# EAGLE board SMARTBALL_v1.2 (EAGLE 9.0.0)
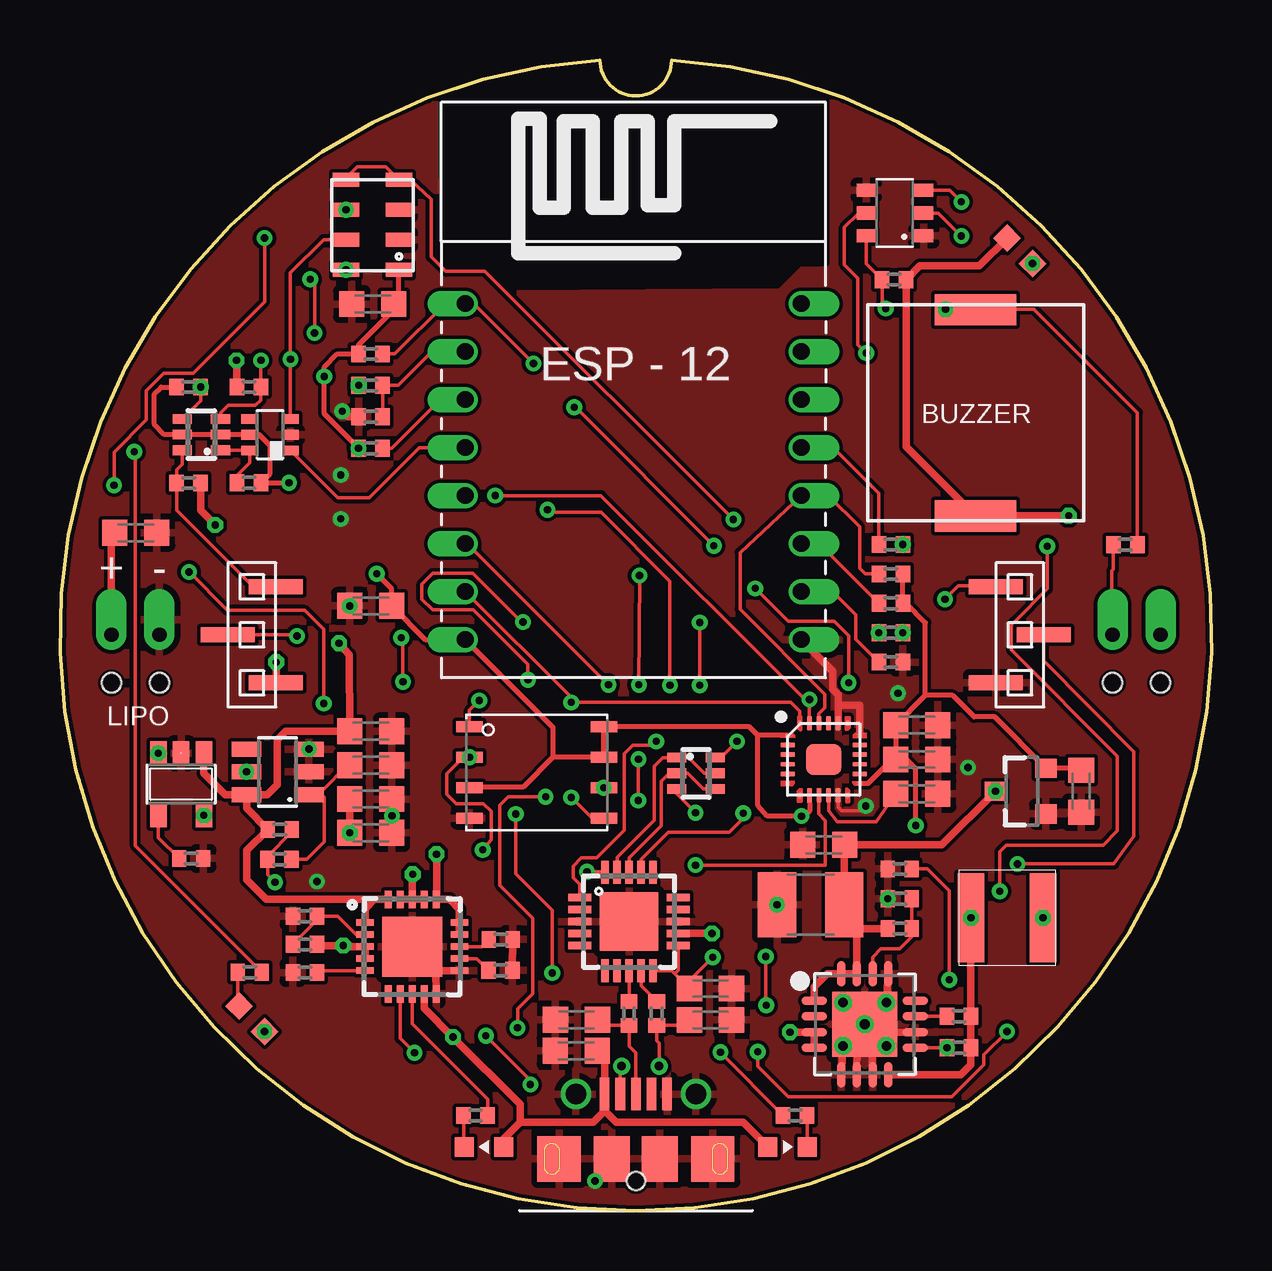
[diagram p0: board, top side]
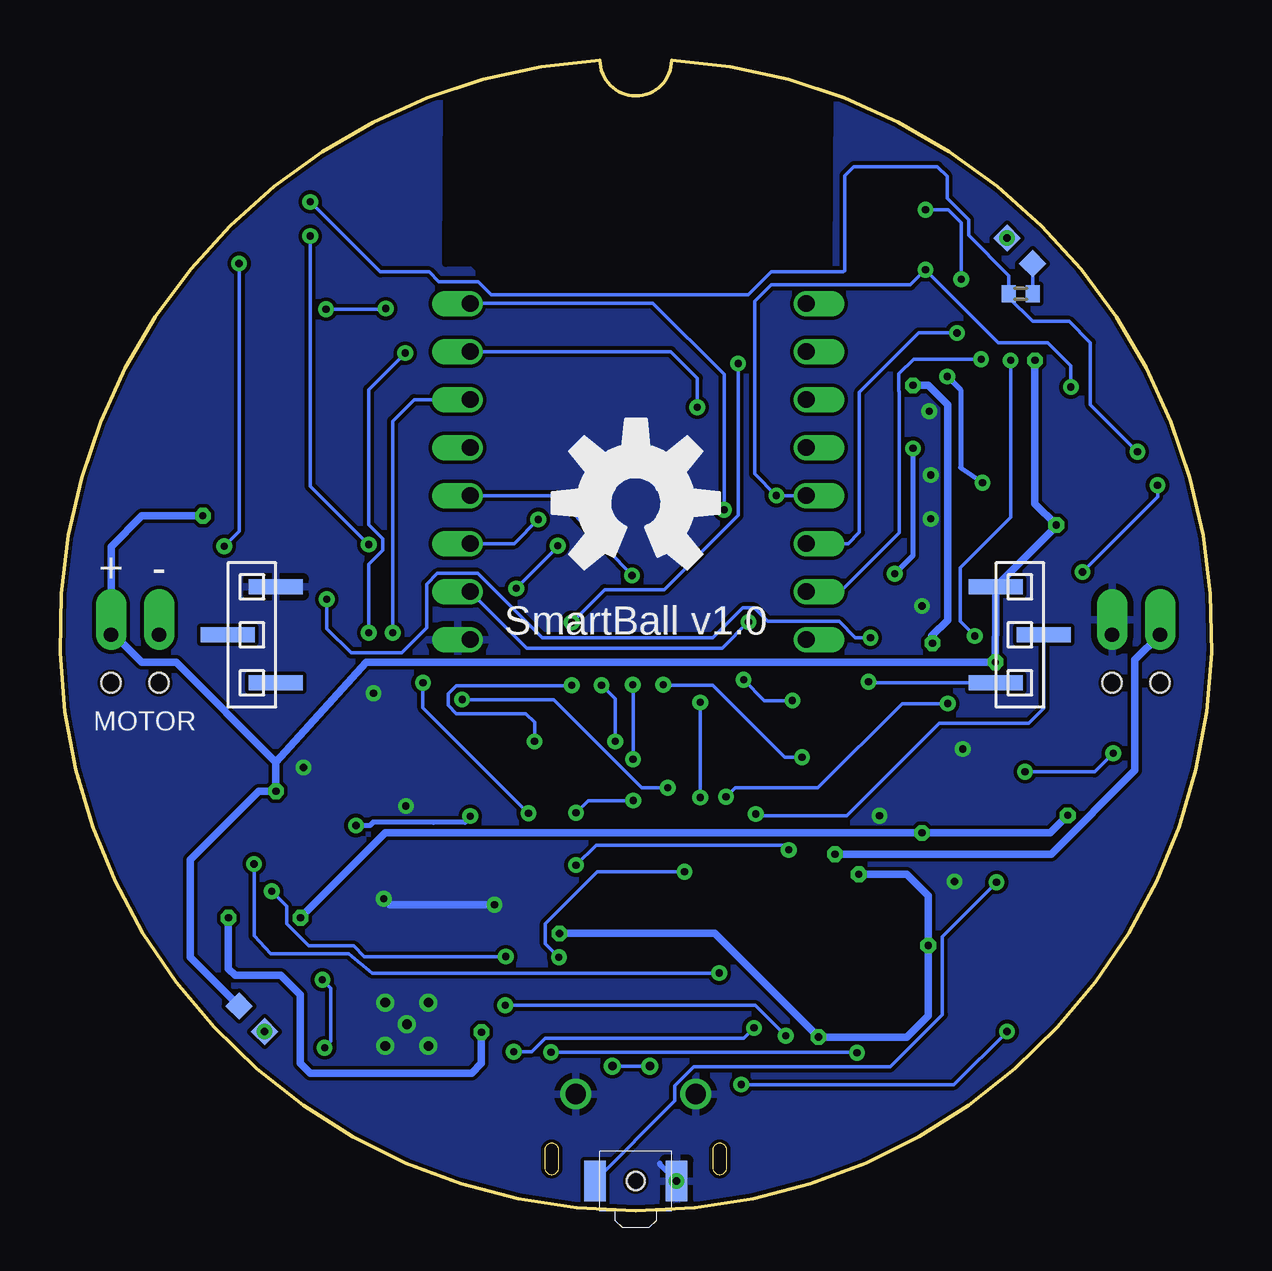
[diagram p1: board, bottom side, seen from below]

Size 47.98 x 47.96 mm. Coordinates in mm from the lower left corner, seen from the top.
Outline: 22.5,47.96 arc353 25.49,47.96 arc-180 22.5,47.96
Copper layers (1*16): Top 0.035mm / dielectric 1.5mm / Bottom 0.035mm
Design rules "PCBWay-LIMIT": minimum track width 4mil, minimum drill 0.3mm, track to track 6mil, track to pad 6mil, pad to pad 6mil, via to via 6mil, smd to smd 6mil, copper to edge 6mil, drill to drill 6mil, minimum pad ring 7mil, minimum via ring 7mil, stop-mask expansion 4mil, vias tented up to drill 25mil, thermal gap 10mil
Net classes: 0 default: width 0.152 mm; 1 power: width 0.254 mm; 2 +3v3: width 0.203 mm

## Footprints (pad centres in the part's own frame; a part is rotated, then mirrored left to right if it is on the bottom)
SOT457R_PHILIPS = smd 0.55 x 0.8: 1 -0.95,-1.2; 2 0,-1.2; 3 0.95,-1.2; 4 0.95,1.2; 5 0,1.2; 6 -0.95,1.2
BUZZER_PKMCS0909E4000-R1 = smd 1.3 x 3.4: P$1 -4.3,0; P$2 4.3,0
C0603K = smd 1.05 x 1.08: 1 -0.875,0; 2 0.875,0
C1210 = smd 1.6 x 2.7: 1 -1.4,0; 2 1.4,0
KINGBRIGHT_16X08 = smd 0.8 x 0.8: ANODE 0,0; CATHODE 1.65,0
ESP12 = drill 0.7 offset: ADC -7.1,3.8; CH_PD -7.1,1.8; GND 6.9,-8.2; GPIO0 6.9,-2.2; GPIO2 6.9,-4.2; GPIO4 6.9,1.8; GPIO5 6.9,-0.2; GPIO12 -7.1,-4.2; GPIO13 -7.1,-6.2; GPIO14 -7.1,-2.2; GPIO15 6.9,-6.2; GPIO16 -7.1,-0.2; RESET -7.1,5.8; RX 6.9,3.8; TX 6.9,5.8; VCC -7.1,-8.2
QFN20 = smd 0.95 x 0.3: 1 -2.05,1; 2 -2.05,0.5; 3 -2.05,0; 4 -2.05,-0.5; 5 -2.05,-1; 11 2.05,-1; 12 2.05,-0.5; 13 2.05,0; 14 2.05,0.5; 15 2.05,1 | smd 0.3 x 0.95: 6 -1,-2.05; 7 -0.5,-2.05; 8 0,-2.05; 9 0.5,-2.05; 10 1,-2.05; 16 1,2.05; 17 0.5,2.05; 18 0,2.05; 19 -0.5,2.05; 20 -1,2.05 | smd 2.45 x 2.45: EXP 0,0
SFH4050 = smd 0.8 x 0.8: P$1 -0.75,0; P$2 0.75,0
ASPIAIG-S4035 = smd 1.1 x 3.7: P$1 -1.5,0; P$2 1.5,0
MOTOR_CONNECTOR = drill 0.6 pad 1.27 offset: + 0,0; - 2,0 | hole 0.8: 0,-2; 2,-2
QFN20_4MM = smd 0.73 x 0.28: P$1 -1.965,1; P$2 -1.965,0.5; P$3 -1.965,0; P$4 -1.965,-0.5; P$5 -1.965,-1; P$11 1.965,-1; P$12 1.965,-0.5; P$13 1.965,0; P$14 1.965,0.5; P$15 1.965,1 | smd 0.28 x 0.73: P$6 -1,-1.965; P$7 -0.5,-1.965; P$8 0,-1.965; P$9 0.5,-1.965; P$10 1,-1.965; P$16 1,1.965; P$17 0.5,1.965; P$18 0,1.965; P$19 -0.5,1.965; P$20 -1,1.965 | smd 2.5 x 2.5: P$21 0,0
B3U-3000P-B = smd 0.9 x 1.7: P$1 0,0; P$2 3.4,0 | hole 0.75: 1.7,0
R0402 = smd 0.6 x 0.7: 1 -0.5,0; 2 0.5,0
PVQFN-16 = smd 1.05 x 0.35: 1 -2.1,0.975; 2 -2.1,0.325; 3 -2.1,-0.325; 4 -2.1,-0.975; 9 2.1,-0.975; 10 2.1,-0.325; 11 2.1,0.325; 12 2.1,0.975 | smd 0.35 x 1.05: 5 -0.975,-2.1; 6 -0.325,-2.1; 7 0.325,-2.1; 8 0.975,-2.1; 13 0.975,2.1; 14 0.325,2.1; 15 -0.325,2.1; 16 -0.975,2.1 | drill 0.4: P$18 0,0; P$19 -0.9,0.9; P$20 0.9,0.9; P$21 0.9,-0.9; P$22 -0.9,-0.9 | smd 2.7 x 2.7: THERMAL 0,0
MOLEX-USB = smd 0.4 x 1.35: D+ 0,2.7; D- -0.65,2.7; GND 1.3,2.7; ID 0.65,2.7; VUSB -1.3,2.7 | smd 1.8 x 1.9: P$1 -3.2,0; P$11 3.2,0 | drill 0.85: SHELL1 -2.5,2.7; SHELL2 2.5,2.7 | smd 1.5 x 1.9: SHELL5 -1,0; SHELL6 1,0
SOT23-5 = smd 0.69 x 0.99: 1 -0.95,-1.29; 2 0,-1.29; 3 0.95,-1.29; 4 0.95,1.3; 5 -0.95,1.3
SOT23-3 = smd 0.8 x 0.9: 1 -0.95,-1; 2 0.95,-1; 3 0,1.1
CONN03_SMD = smd 0.635 x 2.25: P$1 -2,-1; P$2 0,1; P$3 2,-1
TSOT23-6 = smd 0.62 x 1.22: _OUT 0.95,1.3; CLEAR 0.95,-1.3; GND 0,-1.3; IN -0.95,-1.3; OUT 0,1.3; VCC -0.95,1.3
DFN-S = smd 1.1 x 0.45: 1 -2.8,1.905; 2 -2.8,0.635; 3 -2.8,-0.635; 4 -2.8,-1.905; 5 2.8,-1.905; 6 2.8,-0.635; 7 2.8,0.635; 8 2.8,1.905
MS5611-QFN = smd 1.1 x 0.6: P$1 -2.2,3.75; P$2 -2.2,2.5; P$3 -2.2,1.25; P$4 -2.2,0; P$5 0,0; P$6 0,1.25; P$7 0,2.5; P$8 0,3.75
DCK_R-PDSO-G6 = smd 0.4 x 0.7: 1 -0.65,-0.85; 2 0,-0.85; 3 0.65,-0.85; 4 0.65,0.85; 5 0,0.85; 6 -0.65,0.85
QFN24G-0.4-3X3MM = smd 0.2 x 0.15: 1 -1.5,1; 6 -1.5,-1; 13 1.5,-1; 18 1.5,1 | smd 0.6 x 0.2: 2 -1.5,0.6; 3 -1.5,0.2; 4 -1.5,-0.2; 5 -1.5,-0.6; 14 1.5,-0.6; 15 1.5,-0.2; 16 1.5,0.2; 17 1.5,0.6 | smd 0.15 x 0.2: 7 -1,-1.5; 12 1,-1.5; 19 1,1.5; 24 -1,1.5 | smd 0.2 x 0.6: 8 -0.6,-1.5; 9 -0.2,-1.5; 10 0.2,-1.5; 11 0.6,-1.5; 20 0.6,1.5; 21 0.2,1.5; 22 -0.2,1.5; 23 -0.6,1.5 | smd 1.5 x 1.3: 25 0,0
SOT363_PHILIPS = smd 0.4 x 0.8: 1 -0.65,-0.8; 2 0,-0.8; 3 0.65,-0.8; 4 0.65,0.8; 5 0,0.8; 6 -0.65,0.8

## Placement (x,y rotation side)
BC817DS  BC817DS  [SOT457R_PHILIPS]  34.79,41.58 90 top
BUZZER  BUZZER_PKMCS0909E4000-R1  [BUZZER_PKMCS0909E4000-R1]  38.15,33.26 90 top
C1  10uF  [C0603K]  42.55,17.49 270 top
C2  10uF  [C0603K]  12.94,19.99 0 top
C3  10uF  [C0603K]  12.94,18.58 0 top
C4  10uF  [C0603K]  21.51,6.67 180 top
C5  47p  [C0603K]  21.52,7.97 180 top
C6  10uF  [C0603K]  12.94,15.76 0 top
C7  2.2uF  [C0603K]  31.82,15.26 180 top
C8  47p  [C0603K]  27.1,7.96 0 top
C9  100n  [C0603K]  12.94,17.17 0 top
C10  100uF  [C1210]  31.28,12.76 180 top
C11  10uF  [C0603K]  3.15,28.26 0 top
C15  100n  [C0603K]  12.94,25.21 180 top
C16  100n  [C0603K]  27.11,9.27 0 top
C17  100n  [C0603K]  13.03,37.79 180 top
C18  100n  [C0603K]  35.7,17.38 0 top
C19  100n  [C0603K]  35.7,18.81 0 top
C20  10n  [C0603K]  35.7,20.25 180 top
CHARGE  KINGBRIGHT_16X08  [KINGBRIGHT_16X08]  18.49,2.67 180 top
DONE  KINGBRIGHT_16X08  [KINGBRIGHT_16X08]  29.49,2.67 0 top
ESP12F  [ESP12]  23.99,32.01 0 top
FT231XQ  FT231X  [QFN20]  23.71,12.06 0 top
IR5  LED-SFH4050  [SFH4050]  7.99,8.01 135 top
IR6  LED-SFH4050  [SFH4050]  39.99,40.01 315 top
IR7  LED-SFH4050  [SFH4050]  7.99,40.01 315 bottom
IR8  LED-SFH4050  [SFH4050]  39.99,8.01 315 bottom
L1  6.8uH  [ASPIAIG-S4035]  39.46,12.21 0 top
LIPO  BATTERY_CONNECTOR  [MOTOR_CONNECTOR]  2.14,24.01 0 top
LOGO1  OSHW-LOGOL  [OSHW-LOGO-L]  23.99,29.51 0 bottom
MCP73871  MCP73871  [QFN20_4MM]  14.67,11.02 0 top
MOTOR  MOTOR_CONNECTOR  [MOTOR_CONNECTOR]  45.86,24.01 0 bottom
ON/OFF  B3U-3000P-B  [B3U-3000P-B]  22.29,1.25 180 bottom
R1  412  [R0402]  5.47,14.69 0 top
R2  10k  [R0402]  34.62,25.32 0 top
R3  1.87M  [R0402]  34.99,11.77 180 top
R4  200K  [R0402]  34.99,13.01 0 top
R5  270K  [R0402]  10.2,11.11 0 top
R6  340K  [R0402]  34.99,14.25 0 top
R7  1.87M  [R0402]  37.46,6.8 0 top
R8  100K  [R0402]  10.2,12.28 180 top
R9  6K34  [R0402]  17.31,3.98 180 top
R10  22k  [R0402]  9.15,14.65 180 top
R11  200k  [R0402]  9.16,15.89 0 top
R12  27  [R0402]  24.86,8.23 90 top
R13  200K  [R0402]  37.46,8.11 180 top
R14  3K16  [R0402]  30.63,3.98 0 top
R15  27  [R0402]  23.71,8.23 90 top
R16  2K5  [R0402]  18.36,11.31 180 top
R17  100K  [R0402]  18.35,10.03 180 top
R18  10k  [R0402]  7.87,30.34 0 top
R19  10k  [R0402]  5.36,34.33 180 top
R20  10k  [R0402]  5.36,30.33 0 top
R21  10k  [R0402]  34.62,22.87 180 top
R22  10k  [R0402]  34.62,26.54 0 top
R23  10k  [R0402]  12.94,35.71 180 top
R24  10k  [R0402]  12.94,31.78 180 top
R25  422k  [R0402]  12.94,34.4 180 top
R26  100K  [R0402]  12.94,33.09 0 top
R27  10k  [R0402]  7.87,34.33 180 top
R37  15  [R0402]  7.9,9.95 180 top
R38  15  [R0402]  7.95,38.22 0 bottom
R39  1k  [R0402]  34.76,38.81 0 top
R40  2k  [R0402]  34.62,27.77 180 top
R41  2k  [R0402]  34.62,24.1 180 top
R42  10  [R0402]  44.39,27.76 180 top
THERM  15K  [R0402]  10.2,9.94 0 top
TPS61090  TPS61090RSAR  [PVQFN-16]  33.53,7.78 0 top
U$1  MOLEX-USB  [MOLEX-USB]  23.99,2.17 0 top
U$2  FPF2125  [SOT23-5]  5.05,17.78 180 top
U$3  MCP1700T  [SOT23-3]  40.08,17.49 90 top
U$5  CONN_03_SMD  [CONN03_SMD]  7.99,24.01 90 top
U$6  CONN_03_SMD  [CONN03_SMD]  39.99,24.01 270 top
U$12  MAX16054  [TSOT23-6]  9.07,18.3 90 top
U$14  CONN_03_SMD  [CONN03_SMD]  39.99,24.01 90 bottom
U$15  CONN_03_SMD  [CONN03_SMD]  7.99,24.01 270 bottom
U$16  25LC1024DFN-S  [DFN-S]  19.86,18.27 0 top
U$17  MS5611  [MS5611-QFN]  11.92,42.97 180 top
U$20  SN74LVC1G18  [DCK_R-PDSO-G6]  8.75,32.34 90 top
U$21  MPU-9250QFN24G  [QFN24G-0.4-3X3MM]  31.82,18.81 0 top
U$22  2N7002PS  [SOT363_PHILIPS]  5.89,32.35 90 top
UMH3N  UMH3N  [SOT363_PHILIPS]  26.5,18.24 270 top

## Library data of the parts
BC817DS BUZZER CHARGE DONE FT231XQ IR5-IR8 L1 LIPO MOTOR ON/OFF U$1-U$3 U$5 U$6 U$12 U$14-U$17 U$20-U$22 UMH3N = Smartball
C1-C9 C11 C15-C20 = rcl; SPICEPREFIX: C
C10 = rcl
ESP12F = esp8266modules
LOGO1 = SparkFun-Aesthetics
MCP73871 TPS61090 = microbuilder
R1-R27 R37-R42 THERM = rcl; SPICEPREFIX: R

## Nets
+3V3 [+3v3]: C1.1 C15.1 C17.1 C19.1 C20.2 ESP12F.VCC R2.2 R18.2 R19.2 R22.2 R23.2 R24.2 U$3.2 U$16.3 U$16.7 U$16.8 U$17.P$1 U$20.5 U$21.1 U$21.8 U$21.13 U$22.2 U$22.5
+5V [power]: BUZZER.P$1 C7.1 C10.1 IR6.P$1 IR8.P$1 MOTOR.+ R3.2 R20.2 R27.2 R39.2 TPS61090.1 TPS61090.15 TPS61090.16 U$3.3 U$5.P$1 U$15.P$1
CI: R27.1 U$5.P$2 U$22.3
CO: U$6.P$2 U$15.P$2
D0: ESP12F.GPIO16 U$20.1
D1: ESP12F.GPIO4 R41.2
D2: ESP12F.GPIO5 R40.2
D3: ESP12F.GPIO0 R22.1 U$21.22 UMH3N.3
D4: ESP12F.GPIO2 R2.1 U$17.P$4 U$17.P$5
D8: ESP12F.GPIO15 R21.2 U$16.1
DI: R20.1 U$5.P$3 U$22.6
DO: U$6.P$1 U$15.P$3
DTR: FT231XQ.18 UMH3N.2 UMH3N.4
EN1: ESP12F.CH_PD R24.1
ENABLE: R13.2 TPS61090.11
GND [power]: BC817DS.1 BC817DS.4 C1.2 C2.2 C3.2 C4.2 C5.2 C6.2 C7.2 C8.2 C9.2 C10.2 C11.2 C15.2 C16.2 C17.2 C18.2 C19.2 C20.1 ESP12F.GND FT231XQ.3 FT231XQ.13 FT231XQ.EXP LIPO.- MCP73871.P$10 MCP73871.P$11 MCP73871.P$21 ON/OFF.P$1 R1.2 R4.1 R6.1 R8.2 R16.1 R17.1 R21.1 R26.1 THERM.1 TPS61090.5 TPS61090.6 TPS61090.7 TPS61090.10 TPS61090.13 TPS61090.P$18 TPS61090.P$19 TPS61090.P$20 TPS61090.P$21 TPS61090.P$22 TPS61090.THERMAL U$1.GND U$1.P$1 U$1.P$11 U$1.SHELL1 U$1.SHELL2 U$1.SHELL5 U$1.SHELL6 U$2.2 U$3.1 U$6.P$3 U$12.CLEAR U$12.GND U$14.P$3 U$16.4 U$17.P$2 U$17.P$3 U$20.2 U$21.11 U$21.18 U$21.20
MISO: ESP12F.GPIO12 U$16.2 U$17.P$6 U$21.9
MOSI: ESP12F.GPIO13 U$16.5 U$17.P$7 U$20.3 U$21.24
N$1: U$2.3 U$12.OUT
N$2: R1.1 U$2.4
N$3: MCP73871.P$2 R5.1 R8.1
N$4: MCP73871.P$13 R16.2
N$5: FT231XQ.9 R12.2
N$6: FT231XQ.8 R15.2
N$8: ON/OFF.P$2 R10.2 R11.2
N$9: C3.1 R10.1 U$12.IN
N$11: R18.1 U$20.6 U$22.1
N$12: ESP12F.ADC R25.1 R26.2
N$17: L1.P$2 TPS61090.3 TPS61090.4
N$18: R6.2 R7.1 TPS61090.9
N$21: R3.1 R4.2 TPS61090.14
N$22: MCP73871.P$7 R14.1
N$23: MCP73871.P$8 R9.1
N$25: MCP73871.P$5 THERM.2
N$26: DONE.CATHODE R14.2
N$27: CHARGE.CATHODE R9.2
N$28: MCP73871.P$12 R17.2
N$55: IR5.P$2 R37.2
N$56: IR5.P$1 IR6.P$2
N$57: BC817DS.3 R37.1 R38.1
N$58: IR7.P$2 R38.2
N$59: IR7.P$1 IR8.P$2
N$60: BC817DS.6 BUZZER.P$2 R39.1 R42.1
N$61: MOTOR.- R42.2
N$62: BC817DS.5 R41.1
N$63: BC817DS.2 R40.1
REGOUT1: C18.1 U$21.10
RST: ESP12F.RESET R23.1 UMH3N.6
RTS: FT231XQ.19 UMH3N.1 UMH3N.5
RX: ESP12F.TX FT231XQ.1
SCLK: ESP12F.GPIO14 R19.1 U$16.6 U$17.P$8 U$21.23 U$22.4
TX: ESP12F.RX FT231XQ.17
USB+: C5.1 R15.1 U$1.D+
USB-: C8.1 R12.1 U$1.D-
VBAT [power]: C6.1 C9.1 L1.P$1 R7.2 R13.1 TPS61090.8 U$2.5
VBUS [power]: C4.1 CHARGE.ANODE DONE.ANODE FT231XQ.12 MCP73871.P$3 MCP73871.P$4 MCP73871.P$9 MCP73871.P$17 MCP73871.P$18 MCP73871.P$19 R5.2 U$1.VUSB
VCCIO1: C16.1 FT231XQ.10 FT231XQ.11 FT231XQ.20
VLIPO: C11.1 LIPO.+ MCP73871.P$14 MCP73871.P$15 MCP73871.P$16
VSHARE [power]: C2.1 MCP73871.P$1 MCP73871.P$20 R11.1 R25.2 U$2.1 U$12.VCC

## Tracks (layer width: path | path; a pad name or v marks a point on that pad's centre or on a via)
+3V3  (via drill 0.3)
  Top 0.203: C1.1 42.47,18.44 U$3.2 38.94,20.58 38.09,20.58 37.19,21.48 36.06,21.48 | C19.1 C20.2 36.06,21.48 | U$21.13 33.67,17.81 34.67,18.81 C19.1 | 36.06,21.48 36.06,24.52 35.26,25.32 R2.2 R22.2 | U$21.8 31.23,16.67 31.01,16.45 v30.89,16.45 29.47,16.45 29.07,16.9 29.07,19.81 29.08,19.81 | U$21.1 29.08,19.81 | 29.08,19.81 28.72,20.17 U$16.8 U$16.7 20.54,18.9 | 20.54,18.9 19.29,17.66 17.09,17.66 U$16.3 | 20.54,18.9 20.54,20.16 ESP12F.VCC 15.22,23.81 C15.1 13.82,25.93 v13.2,26.55 | R24.2 11.01,33.21 v11.01,34.77 11.01,35.16 11.56,35.71 R23.2 12.44,36.08 13.9,37.54 C17.1 14.12,38.01 U$17.P$1 | v9.54,30.34 R18.2 8.75,30.72 8.75,31.89 8.3,32.34 U$20.5 U$22.2 U$22.5 4.35,32.35 3.93,32.78 3.93,34.05 4.21,34.33 R19.2 | v35.65,16.06 35.65,18.42 35.26,18.81 C19.1
  Bottom 0.203: v30.89,16.45 31.11,16.19 32.43,16.19 34.93,16.2 35.07,16.06 v35.65,16.06 | v11.01,34.77 10.46,34.21 10.46,30.97 v9.54,30.34 | v13.2,26.55 12.44,27.31 R24.2
  other vias: 12.44,31.78
+5V  (via drill 0.3)
  Top 0.305: 33.21,11.69 TPS61090.15 TPS61090.16 31.96,9.88 31.43,9.35 TPS61090.1 | 33.21,11.69 33.21,12.23 C10.1 32.68,15.24 C7.1 36.75,15.26 U$3.3 | R3.2 33.28,11.77 33.21,11.69 | v42.03,28.97 BUZZER.P$1 35.26,31.85 R39.2 35.83,39.38 38.3,39.38 IR6.P$1 | v9.01,22.87 9.02,21.98 U$5.P$1 | v6.47,28.58 5.86,29.19 R20.2 | v7.36,35.44 7.37,35.43 R27.2
  Bottom 0.305: MOTOR.+ 45.85,24.14 | 45.85,24.14 45.85,27.68 44.57,28.97 v42.03,28.97 | v7.36,35.44 7.36,29.47 v6.47,28.58 6.47,28.53 U$15.P$1 8.99,25.05 v9.01,22.87 35.23,22.87 38.98,18.71 | 38.98,18.71 U$3.3 39.71,17.49 42.56,14.64 42.56,10.58 IR8.P$1 | 38.98,18.71 43.15,22.87 44.58,22.87 45.85,24.14
  other vias: 38.98,17.49
CI  (via drill 0.3)
  Top 0.152: U$22.3 6.69,33.25 7,33.56 8.14,33.56 8.37,33.79 R27.1 v8.37,35.44 | v9.87,23.96 9.82,24.01 U$5.P$2
  Bottom 0.152: v8.37,35.44 8.37,28.91 10.48,26.81 10.48,24.57 v9.87,23.96
CO  (via drill 0.3)
  Top 0.152: v18.99,16.54 18.99,14.06 20.51,12.53 v20.51,9.92 | v39.89,14.46 43.91,14.46 44.75,15.61 44.75,19.14 40.99,22.92 U$6.P$2
  Bottom 0.152: U$15.P$2 6.99,20.95 7.61,20.33 11.34,20.33 15.21,16.47 18.91,16.47 v18.99,16.54 | v20.51,9.92 34.97,9.92 35.96,10.73 39.21,10.73 39.89,11.46 v39.89,14.46
D0
  Top 0.152: 9.62,31.68 U$20.1 11.57,29.73 12.89,29.73 14.98,31.81 ESP12F.GPIO16
D1  (via drill 0.3)
  Bottom 0.152: R41.2 34.12,32.91 33.22,33.81 ESP12F.GPIO4
  other vias: 34.12,24.1
D2
  Top 0.152: R40.2 34.12,29.92 32.22,31.81 ESP12F.GPIO5
D3  (via drill 0.3)
  Top 0.152: R22.1 33.55,26.54 33.32,26.78 33.32,28.51 32.01,29.81 ESP12F.GPIO0 28.34,27.43 28.34,25.08 31.87,21.52 31.87,20.96 31.62,20.72 U$21.22 | v24.12,21.93 v24.15,26.48 | v24.1,18.82 24.1,17.11 v24.1,17.1 | v26.48,16.6 25.7,17.38 UMH3N.3
  Bottom 0.152: v24.1,18.82 24.1,21.91 v24.12,21.93 | v24.15,26.48 27.28,29.81 ESP12F.GPIO0 | v24.1,17.1 25.97,17.1 v26.48,16.6
D4  (via drill 0.3)
  Top 0.152: R2.1 31.63,27.81 ESP12F.GPIO2 | v28.06,28.81 17.69,39.15 16.07,39.15 15.46,39.76 15.46,42.15 14.59,42.97 U$17.P$4 13.57,43.52 12.39,43.52 11.92,43.05 U$17.P$5
  Bottom 0.152: ESP12F.GPIO2 29.06,27.81 v28.06,28.81
D8  (via drill 0.3)
  Top 0.152: R21.2 33.16,23.83 33.16,24.85 32.2,25.81 ESP12F.GPIO15 | U$16.1 17.06,20.86 v17.47,21.27 | v19.29,24.55 19.5,24.34 19.43,24.34 17.2,26.57 15.52,26.57 15.08,26.12 15.08,25.5 15.52,25.05 17.22,25.05 19.5,22.77 v19.5,22.13
  Bottom 0.152: v17.47,21.27 18.63,21.27 v19.5,22.13 | v19.29,24.55 20.39,23.45 28.53,23.45 ESP12F.GPIO15
DI
  Top 0.152: U$22.6 5.1,31.12 4.86,30.89 R20.1 4.86,29.2 8.05,26.01 U$5.P$3
DO  (via drill 0.3)
  Top 0.152: v14.29,22.06 14.29,23.81 v14.21,23.89 | v36.87,25.49 37.43,26.04 38.96,26.04 U$6.P$1
  Bottom 0.152: U$15.P$3 14.24,22.01 v14.29,22.06 | v14.21,23.89 14.84,23.89 15.52,24.57 18.49,24.57 19.05,25.13 19.54,25.13 20.78,23.89 27.9,23.89 30.58,26.57 32.26,26.57 32.7,26.12 32.7,24.3 33.75,23.25 35.08,23.25 35.09,23.26 35.24,23.25 35.86,23.25 36.87,24.27 v36.87,25.49
DTR
  Top 0.152: UMH3N.4 26.81,17.59 26.16,18.24 UMH3N.2 25.38,18.24 25.06,17.92 25.06,16.06 23.71,14.71 FT231XQ.18
EN1
  Top 0.152: R24.1 13.83,31.78 15.87,33.82 ESP12F.CH_PD
ENABLE
  Top 0.152: TPS61090.11 R13.2
GND  (via drill 0.3)
  Top 0.152: U$21.18 | U$21.11 32.42,16.83 32.58,16.67 33.37,16.67 v33.57,16.88
  Top 0.203: U$1.SHELL5 22.99,1.95 ON/OFF.P$1
  Top 0.305: TPS61090.10 34.48,7.45 TPS61090.P$21 | TPS61090.13 TPS61090.P$20 | TPS61090.5 TPS61090.P$22 | TPS61090.6 33.21,6.84 33.49,7.66 | 33.49,7.66 TPS61090.THERMAL | TPS61090.7 33.82,6.77 33.49,7.66 | MCP73871.P$10 15.66,10.02 | 15.66,10.02 15.66,10.07 MCP73871.P$21 | MCP73871.P$11 15.66,10.02 | R17.1 R16.1 | R26.1 11.99,33.09 v11.76,33.32 | ESP12F.GND 32.2,22.5 32.2,21.73 32.43,21.51 32.43,21.02 | U$21.18 33.32,21.07 32.48,21.07 32.43,21.02 | U$21.20 32.43,21.02 | U$1.P$11 27.49,2.17 | U$1.P$1 20.49,2.17
  Bottom 0.203: ON/OFF.P$1 22.99,1.95 22.99,2.01
  Bottom 0.305: C10.2 34.24,12.76 R4.1
  other vias: 34.92,21.57 37.84,18.48 10.37,19.25 12.07,25.21 13.83,16.47 10.71,13.73 11.7,30.67 11.7,28.84 29.88,12.76 34.49,13.01 22.29,1.25
  pour Top: -0.01,0.01 47.99,0.01 47.99,48.01 -0.01,48.01
  pour Bottom: -0.01,48.01 -0.01,0.01 47.99,0.01 47.99,48.01
MISO  (via drill 0.3)
  Top 0.152: U$21.9 31.62,16.56 31.89,16.27 31.89,14.41 v26.48,14.41 | v22.85,21.93 16.97,27.81 ESP12F.GPIO12 | v10.61,36.59 10.61,38.64 v10.43,38.82 | v17.62,15.05 17.97,15.48 17.97,16.65 17.64,16.98 16.5,16.98 16.12,17.36 16.12,18.22 16.8,18.9 v17.06,18.9
  Bottom 0.152: v17.06,18.9 17.79,18.9 20.79,21.9 22.83,21.9 v22.85,21.93 | ESP12F.GPIO12 15.14,27.81 14.67,28.28 14.67,34.12 12.21,36.59 v10.61,36.59 | v10.43,38.82 10.43,41.18 10.97,41.72 U$17.P$6 | v26.48,14.41 25.64,15.25 17.59,15.25 v17.62,15.05
  other vias: 11.92,41.72
MOSI  (via drill 0.3)
  Top 0.152: U$20.3 v9.6,35.49 9.6,39.08 10.99,40.47 U$17.P$7 | ESP12F.GPIO13 21.3,21.4 v21.3,21.19 30.45,21.19 30.82,20.82 U$21.24 | v21.3,17.23 22.17,16.36 U$16.5
  Bottom 0.152: v21.3,21.19 v21.3,17.23 | ESP12F.GPIO13 15.47,25.81 13.02,28.25 13.02,34.16 13.02,34.88 12.41,35.49 v9.6,35.49
N$1  (via drill 0.3)
  Bottom 0.152: U$2.3 4.87,18.3 U$12.OUT
  other vias: 4.1,19.07 7.77,18.3
N$2
  Top 0.152: U$2.4 4.1,15.56 R1.1
N$3
  Top 0.152: R5.1 10.7,12.11 R8.1 11.57,12.28 12.34,11.52 MCP73871.P$2
N$4
  Top 0.152: MCP73871.P$13 17.57,11.02 R16.2
N$5
  Top 0.152: R12.2 24.21,9.38 FT231XQ.9
N$6
  Top 0.152: R15.2 FT231XQ.8
N$7
  cutout Bottom: 11.52,43.09 11.52,39.2 14.47,39.23 14.14,39.68 14.14,42.74 14.49,43.09
N$8  (via drill 0.3)
  Top 0.152: R11.2 9.66,15.8 8.65,14.79 R10.2 8.65,14.01 v8.96,13.7
  Bottom 0.152: ON/OFF.P$2 22.36,4.59 22.36,5.23 21.58,6.01 13.39,6.01 11.22,8.18 11.22,11.44 v8.96,13.7
N$9
  Top 0.152: R10.1 10.29,14.65 11.01,15.38 11.01,17.23 10.9,17.35 | 10.9,17.35 U$12.IN | C3.1 11.98,18.58 10.9,17.49 10.9,17.35
N$10
  cutout Top: 11.52,43.09 11.52,39.23 14.47,39.25 14.11,39.73 14.11,42.72 14.49,43.09
N$11
  Top 0.152: U$22.1 U$20.6 7.92,31.68 7.92,31.18 7.37,30.63 R18.1
N$12
  Top 0.152: ESP12F.ADC 16.88,35.82 15.51,35.82 14.09,34.4 R25.1 R26.2
N$13
  cutout Top: 15.93,46.53 15.96,39.44 18.04,39.44 18.91,38.52 29.89,38.59 30.8,39.51 31.9,39.49 31.9,46.58
N$14
  cutout Bottom: 15.91,46.55 15.96,39.44 17.99,39.44 18.91,38.52 29.89,38.62 30.78,39.51 31.9,39.49 31.87,46.58
N$17  (via drill 0.3)
  Top 0.305: v30.42,7.45 v30.42,7.46 TPS61090.3 TPS61090.4
  Bottom 0.305: v30.42,7.45 30.42,6.16 30.83,5.75 37.56,5.75 37.96,6.16 37.96,9 38.78,9.81 40.68,9.81 40.96,10.09 L1.P$2
  other vias: 40.96,12.21
N$18  (via drill 0.3)
  Top 0.152: TPS61090.9 R7.1 | v37.05,9.64 37.05,13.34 36.13,14.26 36.13,14.25 R6.2
  Bottom 0.152: R7.1 36.69,7.07 36.69,9.28 v37.05,9.64
  other vias: 36.96,6.8
N$21
  Top 0.152: TPS61090.14 33.86,10.58 34.2,10.93 34.99,10.93 35.49,11.43 R3.1 R4.2
N$22  (via drill 0.3)
  Top 0.152: R14.1 27.52,6.58 v27.52,6.61 | v14.77,6.59 14.17,7.19 MCP73871.P$7
  Bottom 0.152: v27.52,6.61 14.8,6.61 v14.77,6.59
N$23
  Top 0.152: R9.1 17.81,4.66 14.67,7.8 MCP73871.P$8
N$25
  Top 0.152: THERM.2 10.78,10.02 MCP73871.P$5
N$26
  Top 0.152: DONE.CATHODE 31.14,3.97 R14.2
N$27
  Top 0.152: R9.2 16.81,2.7 CHARGE.CATHODE
N$28
  Top 0.152: MCP73871.P$12 17.37,10.52 R17.2
N$55
  Top 0.152: R37.2 7.4,8.6 IR5.P$2
N$56  (via drill 0.3)
  Top 0.152: v41.14,27.7 41.14,25.92 39.78,24.56 39.77,24.56 39.64,24.42 39.64,23.38 44.06,18.96 44.06,15.83 43.48,15.25 39.44,15.25 39.16,14.97 v39.16,13.32 | v29.4,10.6 29.4,8.59 v29.43,8.57 | v17.75,7.3 19.6,5.45 v19.6,5.27
  Bottom 0.152: IR6.P$2 40.52,28.31 v41.14,27.7 | v39.16,13.32 38.54,12.71 38.54,11.97 37.61,11.04 35.75,11.04 35.3,10.6 v29.4,10.6 | v29.43,8.57 19.02,8.57 v17.75,7.3 | v19.6,5.27 10.73,5.27 IR5.P$1
  other vias: 40.52,39.48 8.52,7.48
N$57  (via drill 0.3)
  Top 0.152: BC817DS.3 37.07,42.53 v37.56,42.05 | R37.1 3.14,15.21 3.14,31.58 v3.09,31.63
  Bottom 0.152: v37.56,42.05 34.64,39.13 32.6,39.13 32.2,38.72 30.55,38.72 30.01,38.19 19.29,38.19 18.35,39.13 15.34,39.13 15.28,39.18 15.28,43.14 14.9,43.52 11.42,43.52 11.01,43.11 11.01,42.2 10.13,41.31 10.13,40.65 8.45,38.97 R38.1 8.45,38.06 7.46,37.07 5.93,37.07 5.05,36.18 5.05,33.59 v3.09,31.63
N$58
  Bottom 0.152: R38.2 IR7.P$2
N$59  (via drill 0.3)
  Top 0.152: IR8.P$2 38.48,6.5 38.48,6.09 37.16,4.76 30.34,4.76 29.07,6.03 v29.07,6.64 | v19.07,7.63 19.07,8.42 19.7,9.05 19.7,12.2 18.33,13.57 18.33,16.9 18.68,17.26 v20.23,17.26 | v10.99,21.14 10.99,24.24 10.2,25.03 6.98,25.03 v5.38,26.63 | v2.25,30.24 2.25,31.62 3.6,32.96 3.6,34.18 4.32,34.91 5.54,34.91 8.52,37.89 IR7.P$1
  Bottom 0.152: v29.07,6.64 28.32,6.64 27.76,7.19 19.5,7.19 v19.07,7.63 | v20.23,17.26 19.85,17.64 16.4,17.64 12.89,21.14 v10.99,21.14 | v5.38,26.63 2.25,29.75 v2.25,30.24
  other vias: 39.46,7.48 8.52,40.54
N$60  (via drill 0.3)
  Top 0.152: BC817DS.6 33.59,39.47 R39.1 34.26,37.75 v34.41,37.6 | R42.1 44.89,33.27 40.58,37.58 38.17,37.58 BUZZER.P$2 36.92,37.56 v36.9,37.58
  Bottom 0.152: v36.9,37.58 34.43,37.58 v34.41,37.6
N$61
  Top 0.152: R42.2 43.89,26.74 43.83,26.68 43.83,24.03 MOTOR.-
N$62  (via drill 0.3)
  Top 0.152: v33.59,35.75 33.24,36.1 33.24,38.87 32.68,39.43 32.68,40.98 33.28,41.58 BC817DS.5
  Bottom 0.152: v33.59,35.75 35.12,34.22 35.12,28.59 34.54,28.01 34.54,27.53 35.12,26.95 R41.1
  other vias: 35.12,24.1
N$63  (via drill 0.3)
  Top 0.152: v37.56,40.62 36.6,41.58 BC817DS.2
  Bottom 0.152: R40.1 37.56,30.21 v37.56,40.62
  other vias: 35.12,27.77
REGOUT1
  Top 0.152: U$21.10 32.02,16.67 32.38,16.21 34.01,16.21 C18.1
RST  (via drill 0.3)
  Top 0.152: R23.1 13.95,35.71 16.05,37.81 ESP12F.RESET 17.23,37.81 v19.73,35.32 | UMH3N.6 27.53,18.89 v28.21,19.57 | v26.66,21.9 v26.66,24.52
  Bottom 0.152: v28.21,19.57 28.21,20.35 28.58,20.73 31.47,20.73 31.81,21.07 31.81,21.55 31.47,21.89 26.67,21.89 v26.66,21.9 | v26.66,24.52 25.29,25.89 22.81,25.89 19.73,28.98 v19.73,35.32
RTS
  Top 0.152: UMH3N.5 26.85,18.24 26.2,18.89 UMH3N.1 25.12,18.89 24.76,18.53 24.76,16.29 23.21,14.75 FT231XQ.19
RX  (via drill 0.3)
  Top 0.152: FT231XQ.1 21.66,13.61 21.38,13.89 21.38,14.37 21.72,14.71 22.37,14.71 23.51,15.86 23.51,19.06 23.86,19.4 24.68,19.4 v24.85,19.57 | v25.42,21.9 25.42,26.25 22.55,29.12 20.41,29.12 v20.31,29.22
  Bottom 0.152: v24.85,19.57 24.85,21.34 v25.42,21.9 | v20.31,29.22 20.31,34.86 23.28,37.83 30.87,37.83 ESP12F.TX
SCLK  (via drill 0.3)
  Top 0.152: U$22.4 5.86,33.77 R19.1 | v18.13,29.81 22.54,29.81 31.22,21.13 | U$21.23 31.22,21.13 | 31.22,21.13 v31.23,21.31
  Bottom 0.152: ESP12F.GPIO14 v18.13,29.81 19.04,30.72 19.04,37.91 18.35,38.59 12.55,38.59 U$17.P$8 8.88,36.18 6.82,36.18 5.86,35.22 R19.1 | v31.23,21.31 27.41,21.31 23.74,17.64 U$16.6
  other vias: 11.92,39.22 5.86,34.33 22.66,17.63
TX  (via drill 0.3)
  Top 0.152: FT231XQ.17 24.21,14.65 25.34,15.78 27.88,15.78 28.46,16.37 v28.46,16.57 | v28.97,25.94 30.35,24.57 32.26,24.57 32.86,23.97 v32.86,22.01 | v27.24,27.72 21.48,33.49 v21.43,33.49
  Bottom 0.152: v28.46,16.57 32.86,20.96 v32.86,22.01 | v28.97,25.94 27.24,27.67 v27.24,27.72 | v21.43,33.49 21.43,34.71 22.53,35.81 ESP12F.RX
USB+
  Top 0.152: C5.1 22.64,7.73 R15.1 23.71,6.87 23.99,6.59 U$1.D+
USB-  (via drill 0.35)
  Top 0.152: R12.1 24.88,7.73 | 24.88,7.73 26,7.73 C8.1 | U$1.D- 23.34,5.98 v23.4,6.03 | v24.97,6.03 24.97,6.99 24.86,7.1 24.86,7.7 24.88,7.73
  Bottom 0.152: v23.4,6.03 v24.97,6.03
VBAT  (via drill 0.3)
  Top 0.305: C6.1 C9.1 | TPS61090.8 37.54,5.68 37.96,6.1 R7.2 R13.1 L1.P$1
  Bottom 0.305: U$2.5 6.72,15.76 C6.1 34.42,15.76 L1.P$1
  other vias: 6,16.48 12.07,15.76 37.96,12.21
VBUS  (via drill 0.3)
  Top 0.254: 10.8,11.02 R5.2
  Top 0.305: C4.1 22.69,6.37 U$1.VUSB 22.69,4.17 | 22.69,4.17 22.22,3.69 19.17,3.69 | 19.17,3.69 18.49,3.02 CHARGE.ANODE | DONE.ANODE 28.47,3.69 23.17,3.69 22.69,4.17 | MCP73871.P$9 15.17,8.45 v16.37,7.25 19.17,4.45 19.17,3.69 | MCP73871.P$4 MCP73871.P$3 11.84,11.02 v11.8,11.06 10.75,11.06 R5.2 | MCP73871.P$19 MCP73871.P$18 | MCP73871.P$18 MCP73871.P$17 | MCP73871.P$18 14.67,14.01 v14.7,14.03 | v27.17,11.57 FT231XQ.12
  Bottom 0.305: v14.7,14.03 12.69,14.03 11.8,13.14 v11.8,11.06 11.8,8.14 12.69,7.25 v16.37,7.25 20.69,11.57 v27.17,11.57
VCCIO1  (via drill 0.3)
  Top 0.152: 25.62,9.89 C16.1 26.23,9.61 v27.19,10.58 | 25.62,9.89 25.49,10.01 FT231XQ.10 | FT231XQ.11 25.76,10.03 25.62,9.89 | v21.96,14.13 22.69,14.13 FT231XQ.20
  Bottom 0.152: v27.19,10.58 27.75,11.13 27.75,11.97 25.59,14.13 v21.96,14.13
VLIPO  (via drill 0.3)
  Top 0.305: MCP73871.P$14 MCP73871.P$15 16.64,12.57 16.23,12.98 MCP73871.P$16 15.69,12.99 v15.69,14.87 | LIPO.+ 2.14,28.12 C11.1
  Bottom 0.305: LIPO.+ 3.19,22.96 3.19,18.36 6.68,14.87 v15.69,14.87
VSHARE  (via drill 0.3, 0.3 pad 0.4)
  Top 0.305: U$12.VCC 6.88,17.35 5.98,18.25 6,18.26 U$2.1 | U$12.VCC 7.77,16.78 R11.1 7.79,15.02 7.79,13.8 8.6,12.99 13.1,12.99 | MCP73871.P$1 12.71,12.6 13.1,12.99 | 13.1,12.99 13.11,12.98 MCP73871.P$20 | U$12.VCC 8.64,17.35 9.06,17.76 9.06,19.64 9.4,19.99 C2.1 12.06,23.17 v11.62,23.66
  Bottom 0.305: v11.62,23.66 11.65,23.96 10.99,24.62 10.99,33.59 11.8,34.4 R25.2
  other vias: 12.44,34.4

## Text on the board
tPlace: BUZZER | LIPO
bPlace: SmartBall v1.0 | MOTOR